# Altium PCB board_pcb.PcbDoc
Units mil, origin at the board's own origin, x right, y up, seen from the top; angles counter-clockwise.
Board outline 3432.09 x 2198.82 mil, 2 copper layers (Top Layer, Bottom Layer); 80 components, 59 nets, 333 pads, 43 vias.
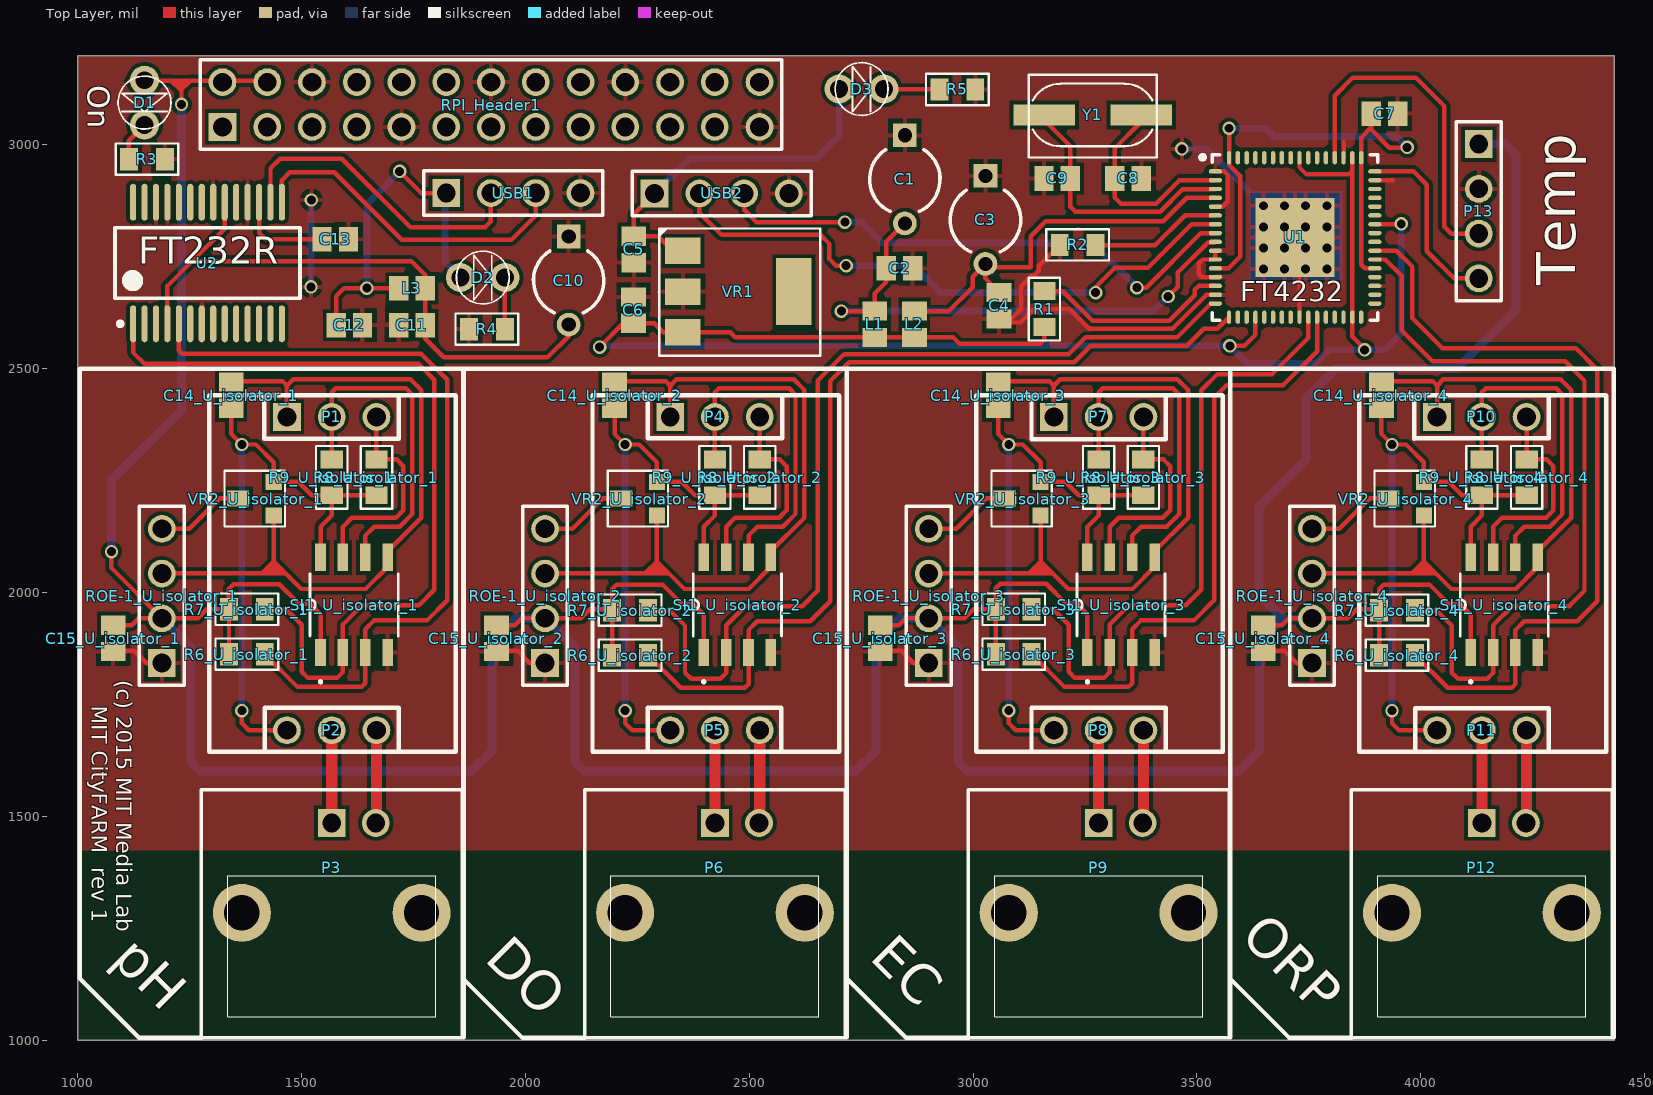
[diagram p0: Top Layer view]
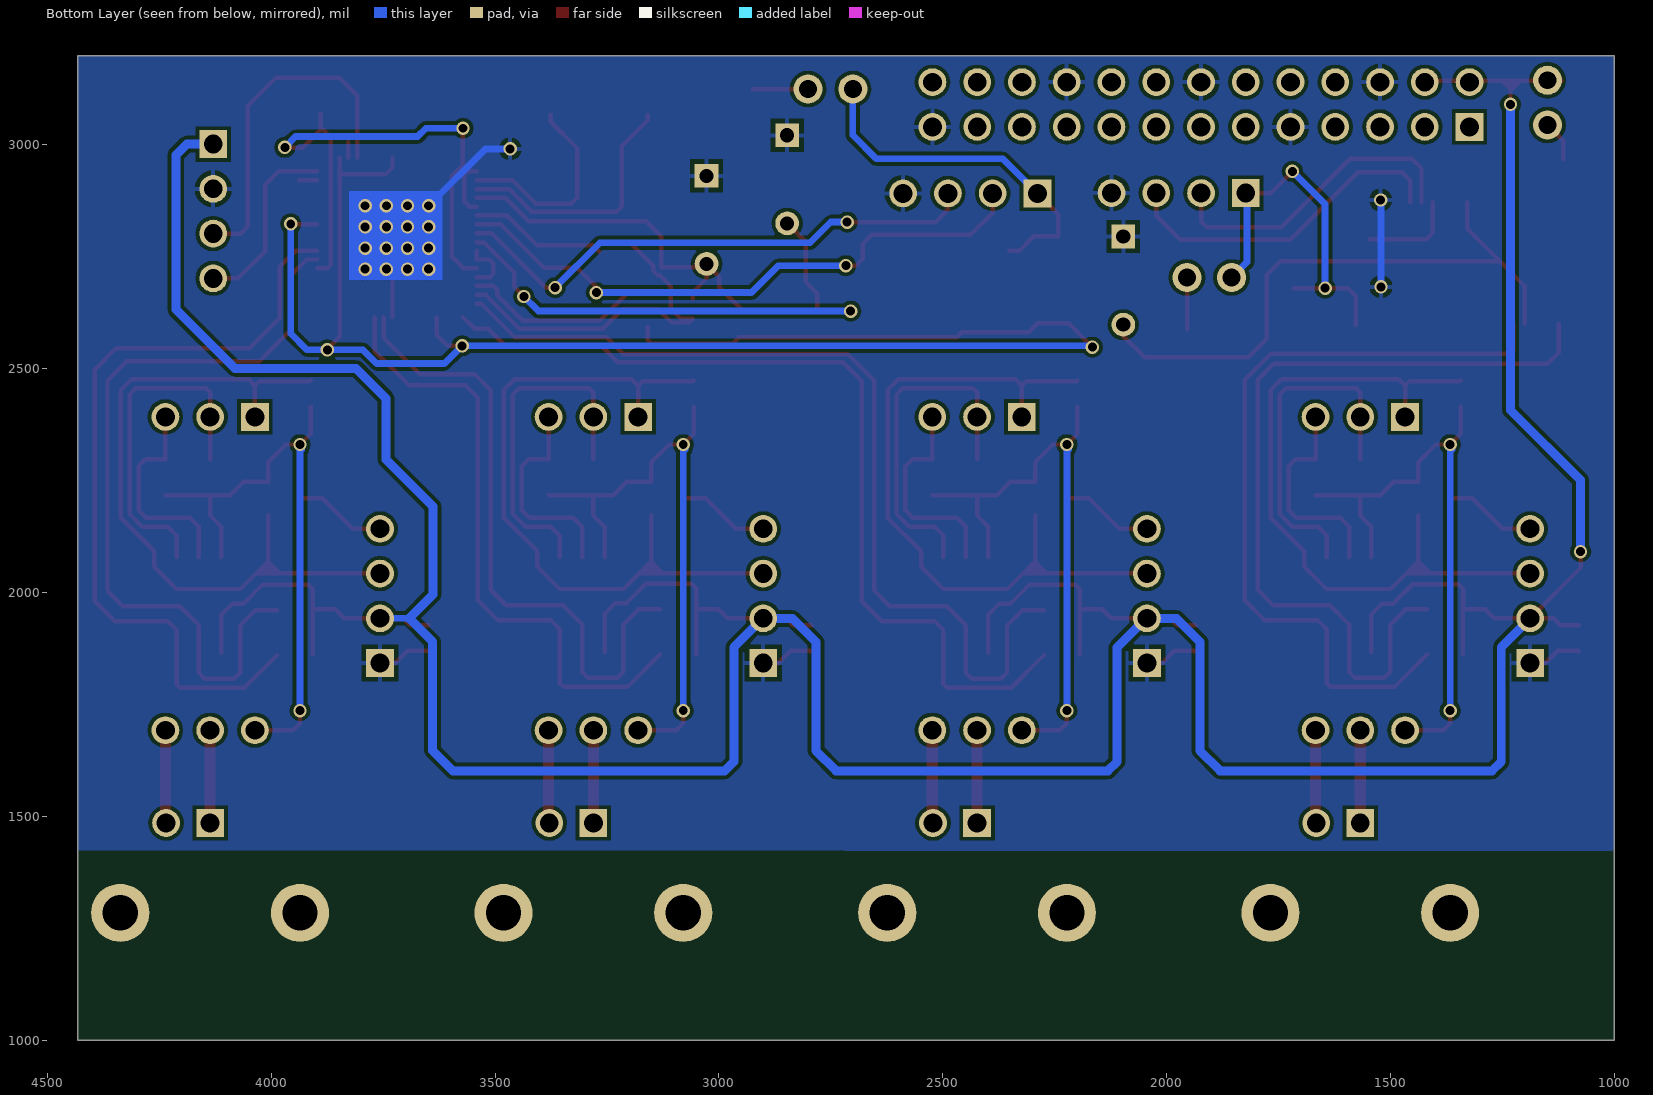
[diagram p1: Bottom Layer view, seen from below]

## Layer stack, top to bottom
Top Solder: solder mask 0.4, Solder Resist, Dk 3.5
Top Layer: signal copper 1.4
Dielectric 1: dielectric 12.6, FR-4, Dk 4.8
Bottom Layer: signal copper 1.4
Bottom Solder: solder mask 0.4, Solder Resist, Dk 3.5

## Board outline
1000,1000 1000,3198.82 4432.09,3198.82 4432.09,1000

## Design rules (kind name [scope] priority, off if disabled: settings)
Clearance [All] p1: gap=8
MinimumSolderMaskSliver [All] p1: minsoldermaskwidth=1.5
PolygonConnect [All] p1: connectstyle=Relief reliefconductorwidth=10 reliefentries=4 polygonreliefangle="90 Angle" airgapwidth=10
RoutingVias [All] p1: holewidth=20 width=50 viastyle="Through Hole" minholewidth=20 minwidth=50 maxholewidth=20 maxwidth=50
SilkToSolderMaskClearance [IsPad] p1: minsilkscreentomaskgap=1 clearancetoexposedcopper=TRUE
SolderMaskExpansion [All] p1: expansion=4
UnpouredPolygon [All] p1: allowunpoured=FALSE
Width [All] p1: maxlimit=25 minlimit=10 preferedwidth=10
27 further rules are at their usual default settings.

## Classes and differential pairs
channel class isolator: U_isolator_1 U_isolator_2 U_isolator_3 U_isolator_4
component class U_serial_4: C1 C2 C3 C4 C5 C6 C7 C8 C9 C071_035 C072_035 C075_029 C080_035 C082_029 C084_035 C096_035 C098_035 C102_035 L1 L2 L079_030 L094_035 R1 R2 R078_035 U1 VR1 VR086_034 Y1 Y074_033
component class U_serial_1: C10 C11 C12 C13 C075_029 C077_029 C096_035 C102_035 L3 L079_030 U2
component class U_isolator_4: C14_U_isolator_4 C15_U_isolator_4 R1_2 R2_ R3_2 R4_ R6_U_isolator_4 R7_U_isolator_4 R8_U_isolator_4 R9_U_isolator_4 R17 R18 R19 R21 ROE-1_U_isolator_4 ROE-4 ROE-0505_2 SI1_U_isolator_4 SI4 SI8600_2 VR2_U_isolator_4
component class U_isolator_3: C14_U_isolator_3 C15_U_isolator_3 R1_2 R2_ R3_2 R4_ R6_U_isolator_3 R7_U_isolator_3 R8_U_isolator_3 R9_U_isolator_3 R14 R15 R16 R20 ROE-1_U_isolator_3 ROE-3 ROE-0505_2 SI1_U_isolator_3 SI3 SI8600_2 VR2_U_isolator_3
component class U_isolator_2: C14_U_isolator_2 C15_U_isolator_2 R1_2 R2_ R3_2 R4_ R6_U_isolator_2 R7_U_isolator_2 R8_U_isolator_2 R9_U_isolator_2 R10 R11 R12 R13 ROE-1_U_isolator_2 ROE-2 ROE-0505_2 SI1_U_isolator_2 SI2 SI8600_2 VR2_U_isolator_2
component class U_isolator_1: C14_U_isolator_1 C15_U_isolator_1 R R1_2 R2_ R3_2 R4_ R6_U_isolator_1 R7_U_isolator_1 R8_U_isolator_1 R9_U_isolator_1 ROE-1 ROE-1_U_isolator_1 ROE-0505_2 SI SI1 SI1_U_isolator_1 SI8600_2 VR2_U_isolator_1
component class board: D1 D2 D3 D085_023 D126_023 D137_023 P1 P2 P3 P4 P5 P6 P7 P8 P9 P10 P11 P12 P13 P070_021 P072_022 P074_022 P079_023 P088_022 P089_022 P094_023 P101_022 P103_022 P107_023 P113_022 P115_022 P119_023 R3 R4 R5 RPI_Header1 USB1 USB2 USB098_021 USB111_021

## Components (designator, comment, footprint, x,y, rotation, side; value= is the part's Value field where it differs from the comment)
C1 "Cap2" CAPR5-4X5 2847.44,2923.23 r270 top locked
C2 "Cap" C0805 2835.63,2724.41 r180 top locked
C3 "Cap2" CAPR5-4X5 3027.56,2832.68 r270 top locked
C4 "Cap" C0805 3058.07,2640.75 r90 top locked
C5 "Cap" C0805 2242.13,2766.73 r90 top locked
C6 "Cap" C0805 2241.14,2630.91 r270 top locked
C7 "Cap" C0805 3919.29,3069.88 r180 top locked
C8 "Cap" C0805 3346.46,2925.2 r180 top locked
C9 "Cap" C0805 3187.99,2925.2 r0 top locked
C10 "Cap2" CAPR5-4X5 2096.46,2696.85 r270 top locked
C11 "Cap" C0805 1746.06,2597.44 r0 top locked
C12 "Cap" C0805 1606.3,2597.44 r180 top locked
C13 "Cap" C0805 1574.8,2789.37 r180 top locked
C14_U_isolator_1 "Cap" C0805 1342.52,2440.94 r270 top locked (schematic designator C14)
C14_U_isolator_2 "Cap" C0805 2198.82,2440.94 r270 top locked (schematic designator C14)
C14_U_isolator_3 "Cap" C0805 3056.1,2440.94 r270 top locked (schematic designator C14)
C14_U_isolator_4 "Cap" C0805 3912.4,2440.94 r270 top locked (schematic designator C14)
C15_U_isolator_1 "Cap" C0805 1078.74,1897.64 r90 top locked (schematic designator C15)
C15_U_isolator_2 "Cap" C0805 1935.04,1897.64 r90 top locked (schematic designator C15)
C15_U_isolator_3 "Cap" C0805 2792.32,1897.64 r90 top locked (schematic designator C15)
C15_U_isolator_4 "Cap" C0805 3648.62,1897.64 r90 top locked (schematic designator C15)
D1 "LED-3MM-GENERIC" LED-3MM-BLUE 1148.62,3144.68 r270 top
D2 "LED-3MM-GENERIC" LED-3MM-BLUE 1854.33,2703.74 r0 top locked
D3 "LED-3MM-GENERIC" LED-3MM-BLUE 2700.79,3125 r0 top locked
L1 "Inductor" C0805 2780.51,2599.41 r90 top locked
L2 "Inductor" C0805 2869.09,2599.41 r90 top locked
L3 "Inductor" C0805 1746.06,2680.12 r0 top locked
P1 "Header 3" HDR1X3#1 1466.93,2392.3 r0 top locked
P2 "Header 3" HDR1X3#2 1466.93,1692.3 r0 top locked
P3 "BNC" "BNC_RA CON" 1566.93,1485.02 r90 top locked
P4 "Header 3" HDR1X3#1 2323.23,2392.3 r0 top locked
P5 "Header 3" HDR1X3#2 2323.23,1692.3 r0 top locked
P6 "BNC" "BNC_RA CON" 2423.23,1485.02 r90 top locked
P7 "Header 3" HDR1X3#1 3180.51,2392.3 r0 top locked
P8 "Header 3" HDR1X3#2 3180.51,1692.3 r0 top locked
P9 "BNC" "BNC_RA CON" 3280.51,1485.02 r90 top locked
P10 "Header 3" HDR1X3#1 4036.81,2392.3 r0 top locked
P11 "Header 3" HDR1X3#2 4036.81,1692.3 r0 top locked
P12 "BNC" "BNC_RA CON" 4136.81,1485.02 r90 top locked
P13 "Header 4" HDR1X4 4129.92,3001.97 r270 top locked
R1 "Res1" 0805R-1K 3159.45,2663.39 r270 top locked
R2 "12K" 0805R-12K 3203.74,2776.57 r0 top locked
R3 "Res1" 0805R-330 1114.17,2968.5 r0 top locked
R4 "Res1" 0805R-330 1953.74,2588.58 r180 top locked
R5 "Res1" 0805R-330 3004.92,3124.02 r180 top locked
R6_U_isolator_1 "Res1" 0805R-10K 1417.32,1862.2 r180 top locked (schematic designator R6)
R6_U_isolator_2 "Res1" 0805R-10K 2273.62,1860.24 r180 top locked (schematic designator R6)
R6_U_isolator_3 "Res1" 0805R-10K 3130.91,1862.2 r180 top locked (schematic designator R6)
R6_U_isolator_4 "Res1" 0805R-10K 3987.2,1860.24 r180 top locked (schematic designator R6)
R7_U_isolator_1 "Res1" 0805R-10K 1417.32,1962.6 r180 top locked (schematic designator R7)
R7_U_isolator_2 "Res1" 0805R-10K 2273.62,1960.63 r180 top locked (schematic designator R7)
R7_U_isolator_3 "Res1" 0805R-10K 3130.91,1962.6 r180 top locked (schematic designator R7)
R7_U_isolator_4 "Res1" 0805R-10K 3987.2,1960.63 r180 top locked (schematic designator R7)
R8_U_isolator_1 "Res1" 0805R-10K 1666.93,2297.3 r270 top locked (schematic designator R8)
R8_U_isolator_2 "Res1" 0805R-10K 2523.23,2297.3 r270 top locked (schematic designator R8)
R8_U_isolator_3 "Res1" 0805R-10K 3380.51,2297.3 r270 top locked (schematic designator R8)
R8_U_isolator_4 "Res1" 0805R-10K 4236.81,2297.3 r270 top locked (schematic designator R8)
R9_U_isolator_1 "Res1" 0805R-10K 1566.93,2297.3 r270 top locked (schematic designator R9)
R9_U_isolator_2 "Res1" 0805R-10K 2423.23,2297.3 r270 top locked (schematic designator R9)
R9_U_isolator_3 "Res1" 0805R-10K 3280.51,2297.3 r270 top locked (schematic designator R9)
R9_U_isolator_4 "Res1" 0805R-10K 4136.81,2297.3 r270 top locked (schematic designator R9)
ROE-1_U_isolator_1 "U1" HDR1X4 1187.4,1842.3 r90 top locked (schematic designator ROE-1)
ROE-1_U_isolator_2 "U1" HDR1X4 2043.7,1842.3 r90 top locked (schematic designator ROE-1)
ROE-1_U_isolator_3 "U1" HDR1X4 2900.98,1842.3 r90 top locked (schematic designator ROE-1)
ROE-1_U_isolator_4 "U1" HDR1X4 3757.28,1842.3 r90 top locked (schematic designator ROE-1)
RPI_Header1 "Header 13X2" HDR2X13 1322.83,3040.35 r0 top
SI1_U_isolator_1 "Si" SOIC-8 1616.93,1972.3 r90 top (schematic designator SI1)
SI1_U_isolator_2 "Si" SOIC-8 2473.23,1972.3 r90 top locked (schematic designator SI1)
SI1_U_isolator_3 "Si" SOIC-8 3330.51,1972.3 r90 top locked (schematic designator SI1)
SI1_U_isolator_4 "Si" SOIC-8 4186.81,1972.3 r90 top locked (schematic designator SI1)
U1 "FT4232" QFN64_2_N 3719.49,2793.31 r0 top locked
U2 "FT232R" SSOP-28_N 1289.37,2736.22 r90 top locked
USB1 "Header 4" HDR1X4 1822.72,2892.56 r0 top locked
USB2 "Header 4" HDR1X4 2288.39,2891.73 r0 top locked
VR1 "Volt Reg" SOT223 2458.66,2672.24 r270 top locked
VR2_U_isolator_1 "Volt Reg" SOT23-123 1437.4,2172.3 r180 top locked (schematic designator VR2)
VR2_U_isolator_2 "Volt Reg" SOT23-123 2293.7,2172.3 r180 top locked (schematic designator VR2)
VR2_U_isolator_3 "Volt Reg" SOT23-123 3150.98,2172.3 r180 top locked (schematic designator VR2)
VR2_U_isolator_4 "Volt Reg" SOT23-123 4007.28,2172.3 r180 top locked (schematic designator VR2)
Y1 "12MHz" XTAL-HC49US-7MM 3375.43,3067.01 r180 top locked

## Footprints (in the part's own frame and the unit in brackets; to place one, negate y for a bottom-side part, rotate by r counter-clockwise, add the part's x,y. Pads: shape width x height; smd on the part's side, far side on the other; paste and mask are expansions set on the pad)
0805R-1K [mil] "RESISTOR 0805"
  rect 40x50 smd: 1(-10,0) 2(70,0)
  silkscreen extent -40,-35 100,35, body extent -11,-25 70,25, height 27
0805R-10K [mil] "RESISTOR 0805"
  rect 40x50 smd: 1(0,0) 2(80,0)
  silkscreen extent -30,-35 110,35, body extent -1,-25 80,25, height 27
0805R-12K [mil] "RESISTOR 0805"
  rect 40x50 smd: 1(-10,0) 2(70,0)
  silkscreen extent -40,-35 100,35, body extent -11,-25 70,25, height 27
0805R-330 [mil] "RESISTOR 0805"
  rect 40x50 smd: 1(0,0) 2(80,0)
  silkscreen extent -30,-35 110,35, body extent -1,-25 80,25, height 27
"BNC_RA CON" [mm] "Connector; BNC Elbow"
  rect 1.575x1.575 hole 1.067: 1(0,0)
  round 3.3 hole 2: 2(-5.1,-5.1) 2(-5.1,5.1)
  round 1.575 hole 1.067: 2(0,-2.5)
  silkscreen extent -12.2,-7.4 1.9,7.4
C0805 [mm] "Chip Capacitor, Body 2.0x1.3mm, IPC High Density"
  rect 1.1x1.4 smd: 1(-0.75,0) 2(0.75,0)
  body extent -1.1,-0.72 1.1,0.72, height 1.4
CAPR5-4X5 [mm] "Capacitor; 2 Leads"
  rect 1.35x1.35 hole 0.8: 1(-2.5,0)
  round 1.35 hole 0.8: 2(2.5,0)
  silkscreen extent -1.69,-2 1.82,2
HDR1X3#1 [mil] "Connector; Header; 3 Position"
  rect 62x62 hole 42: 1(0,0)
  round 62 hole 42: 2(100,0) 3(200,0)
HDR1X3#2 [mil] "Connector; Header; 3 Position"
  round 62 hole 42: 1(0,0) 2(100,0) 3(200,0)
HDR1X4 [mil] "Connector; Header; 4 Position"
  rect 62x62 hole 42: 1(0,0)
  round 62 hole 42: 2(100,0) 3(200,0) 4(300,0)
  silkscreen extent -50,-50 350,50
HDR2X13 [mil] "Connector; Header; 13x2 Position"
  rect 62x62 hole 42: 1(0,0)
  round 62 hole 42: 2(0,100) 3(100,0) 4(100,100) 5(200,0) 6(200,100) 7(300,0) 8(300,100) 9(400,0) 10(400,100) 11(500,0) 12(500,100) 13(600,0) 14(600,100) 15(700,0) 16(700,100) 17(800,0) 18(800,100) 19(900,0) 20(900,100) 21(1000,0) 22(1000,100) 23(1100,0) 24(1100,100) 25(1200,0) 26(1200,100)
  silkscreen extent -50,-50 1250,150
LED-3MM-BLUE [mil]
  round 65 hole 40: A(0,0) K(100,0)
  silkscreen extent -9,-59 109,59, body extent -15,-63 114,67, height 250
QFN64_2_N [mm] "QFN, 64-Leads, Body 9x9mm, Pitch 0.5mm, IPC Medium Density"
  oval 0.75x0.25 smd: 1(-4.525,3.75) 2(-4.525,3.25) 3(-4.525,2.75) 4(-4.525,2.25) 5(-4.525,1.75) 6(-4.525,1.25) 7(-4.525,0.75) 8(-4.525,0.25) 9(-4.525,-0.25) 10(-4.525,-0.75) 11(-4.525,-1.25) 12(-4.525,-1.75) 13(-4.525,-2.25) 14(-4.525,-2.75) 15(-4.525,-3.25) 16(-4.525,-3.75) 33(4.525,-3.75) 34(4.525,-3.25) 35(4.525,-2.75) 36(4.525,-2.25) 37(4.525,-1.75) 38(4.525,-1.25) 39(4.525,-0.75) 40(4.525,-0.25) 41(4.525,0.25) 42(4.525,0.75) 43(4.525,1.25) 44(4.525,1.75) 45(4.525,2.25) 46(4.525,2.75) 47(4.525,3.25) 48(4.525,3.75)
  oval 0.25x0.75 smd: 17(-3.75,-4.525) 18(-3.25,-4.525) 19(-2.75,-4.525) 20(-2.25,-4.525) 21(-1.75,-4.525) 22(-1.25,-4.525) 23(-0.75,-4.525) 24(-0.25,-4.525) 25(0.25,-4.525) 26(0.75,-4.525) 27(1.25,-4.525) 28(1.75,-4.525) 29(2.25,-4.525) 30(2.75,-4.525) 31(3.25,-4.525) 32(3.75,-4.525) 49(3.75,4.525) 50(3.25,4.525) 51(2.75,4.525) 52(2.25,4.525) 53(1.75,4.525) 54(1.25,4.525) 55(0.75,4.525) 56(0.25,4.525) 57(-0.25,4.525) 58(-0.75,4.525) 59(-1.25,4.525) 60(-1.75,4.525) 61(-2.25,4.525) 62(-2.75,4.525) 63(-3.25,4.525) 64(-3.75,4.525)
  rect 4.5x4.5 smd: 65(0,0)
  silkscreen extent -5.37,-4.7 4.7,4.7, body extent -4.55,-4.55 4.55,4.55, height 1
SOIC-8 [mm]
  rect 1.55x0.6 smd: 1(-2.7,1.905) 2(-2.7,0.635) 3(-2.7,-0.635) 4(-2.7,-1.905) 5(2.7,-1.905) 6(2.7,-0.635) 7(2.7,0.635) 8(2.7,1.905)
  silkscreen extent -4.44,-2.5 1.77,2.5
SOT23-123 [mil]
  rect 36x36 smd: 1(0,0) 2(0,-75)
  rect 50x36 smd: 3(80,-38)
  silkscreen extent -25,-100 110,25, body extent -3,-95 94,20, height 41
SOT223 [mil]
  rect 59x79 smd: 1(-91,-107) 2(0,-107) 3(91,-107)
  rect 150x79 smd: 4(0,141)
  silkscreen extent -141,-161 143,200, body extent -131,-105 135,162, height 51
SSOP-28_N [mm] "SOP, 28-Leads, Body 10.2x5.3mm, Pitch 0.65mm, IPC Medium Density"
  oval 2.1x0.35 smd: 1(-3.45,4.225) 2(-3.45,3.575) 3(-3.45,2.925) 4(-3.45,2.275) 5(-3.45,1.625) 6(-3.45,0.975) 7(-3.45,0.325) 8(-3.45,-0.325) 9(-3.45,-0.975) 10(-3.45,-1.625) 11(-3.45,-2.275) 12(-3.45,-2.925) 13(-3.45,-3.575) 14(-3.45,-4.225) 15(3.45,-4.225) 16(3.45,-3.575) 17(3.45,-2.925) 18(3.45,-2.275) 19(3.45,-1.625) 20(3.45,-0.975) 21(3.45,-0.325) 22(3.45,0.325) 23(3.45,0.975) 24(3.45,1.625) 25(3.45,2.275) 26(3.45,2.925) 27(3.45,3.575) 28(3.45,4.225)
  silkscreen extent -3.57,-5.25 2,5.25, body extent -2.8,-5.25 2.8,5.25, height 2
XTAL-HC49US-7MM [mm]
  rect 3.5x1.2 smd: 1(0,0) 2(5.499,0)
  silkscreen extent -0.89,-2.29 6.38,2.41, body extent -1.61,-2.27 7.07,2.41, height 3.05

## Part data
C1 C2 C3 C4 C5 C6 C7 C8 C9 C10 C11 C12 C13 C14_U_isolator_1 C14_U_isolator_2 C14_U_isolator_3 C14_U_isolator_4 C15_U_isolator_1 C15_U_isolator_2 C15_U_isolator_3 C15_U_isolator_4: "Capacitor"
D1 D2 D3: "GENERIC LED 3MM"
P1 P2 P4 P5 P7 P8 P10 P11: "Header, 3-Pin"
P3 P6 P9 P12: "BNC Elbow Connector"
P13 USB1 USB2: "Header, 4-Pin"
R1 R3 R4 R5 R6_U_isolator_1 R6_U_isolator_2 R6_U_isolator_3 R6_U_isolator_4 R7_U_isolator_1 R7_U_isolator_2 R7_U_isolator_3 R7_U_isolator_4 R8_U_isolator_1 R8_U_isolator_2 R8_U_isolator_3 R8_U_isolator_4 R9_U_isolator_1 R9_U_isolator_2 R9_U_isolator_3 R9_U_isolator_4: "Resistor"
R2: library part Res1, "Resistor"
ROE-1_U_isolator_1 ROE-1_U_isolator_2 ROE-1_U_isolator_3 ROE-1_U_isolator_4: library part "Header 4", "Header, 4-Pin"
RPI_Header1: "Header, 13-Pin, Dual row"
SI1_U_isolator_1 SI1_U_isolator_2 SI1_U_isolator_3 SI1_U_isolator_4: library part Si8600AC-B-IS, "Imported"
U1: library part FT4232HQ-Tray, "Quad High Speed USB To Multipurpose UART/MPSSE IC, QFN-64, Tray"
U2: library part FT232RL-Tray, "USB UART Asynchronous Serial Data Transfer Chip, SSOP-28, Tray"
VR1 VR2_U_isolator_1 VR2_U_isolator_2 VR2_U_isolator_3 VR2_U_isolator_4: "Voltage Regulator"
Y1: library part XTAL, "Crystal Oscillator"

## Via types
v1: diameter 30, hole 20, Top Layer to Bottom Layer, 27 vias
v2: diameter 30, hole 20, Top Layer to Bottom Layer, tented top, 16 vias

## Nets (pads, with @x,y where several pads share a name; then routed paths per layer and width w, separated by ;. In a path a pad name is that pad's centre, name@x,y a point inside that pad or via, vN(x,y) a via of type N, cw(c..) or ccw(c..) an arc to the next point about the centre after c; other vN are vias at no path point)
GND: C1.1 C2.1 C3.1 C4.1 C5.1 C6.1 C7.1 C8.1 C9.1 C10.1 C11.1 C12.1 C13.1 C15_U_isolator_1.1 C15_U_isolator_2.1 C15_U_isolator_3.1 C15_U_isolator_4.1 P13.2 R2.1 R3.2 R4.2 R5.1 ROE-1_U_isolator_1.1 ROE-1_U_isolator_2.1 ROE-1_U_isolator_3.1 ROE-1_U_isolator_4.1 RPI_Header1.6 RPI_Header1.9 RPI_Header1.14 RPI_Header1.20 RPI_Header1.25 SI1_U_isolator_1.4 SI1_U_isolator_2.4 SI1_U_isolator_3.4 SI1_U_isolator_4.4 U1.1 U1.5 U1.10 U1.11 U1.13 U1.15 U1.25 U1.35 U1.47 U1.51 U1.65 U2.7 U2.18 U2.21 U2.25 U2.26 USB1.4 USB2.4 VR1.2 | length 2156.2
  Top Layer w10: C15_U_isolator_1.1 1080.71,1870.08 1125.98,1870.08 1153.76,1842.3 ROE-1_U_isolator_1.1 ; RPI_Header1.9@1703.74,3043.31 RPI_Header1.9@1723.82,3043.31 ; C15_U_isolator_2.1 1937.01,1870.08 1982.28,1870.08 2010.06,1842.3 ROE-1_U_isolator_2.1 ; C15_U_isolator_3.1 2794.29,1870.08 2839.57,1870.08 2867.35,1842.3 ROE-1_U_isolator_3.1 ; R2.1 3146.94,2729.77 3146.94,2718.92 3136.39,2708.38 3131.06,2708.38 3107.28,2684.61 3107.28,2633.86 3084.64,2611.22 C4.1 3065.94,2603.35 3106.02,2603.35 3135.55,2632.87 3215.69,2632.87 3259.28,2589.28 3445.45,2589.28 3521.52,2665.35 U1.15 ; U1.13 3511.32,2704.72 3504.18,2711.86 3504.18,2735.48 3512.8,2744.09 U1.11 U1.10 ; U1.5 3556.84,2862.2 3569.1,2874.47 3569.1,2933 3561.16,2940.94 U1.1 ; C15_U_isolator_4.1 3650.59,1870.08 3695.87,1870.08 3723.65,1842.3 ROE-1_U_isolator_4.1 ; U1.25 3729.33,2708.66 v2(3743.11,2722.44) ; U1.51 3827.76,3005.9 ; U1.47 3938.27,2921.26
  Bottom Layer w15: v1(1520.67,2683.07) 1520.67,2875.98 v1(1521.65,2876.97) ; v1(3466.54,2991.14) 3521.65,2991.14 v2(3648.62,2864.17)
  other v2: 3648.62,2722.44 3695.87,2722.44 3790.35,2722.44 3648.62,2769.68 3695.87,2769.68 3743.11,2769.68 3790.35,2769.68 3648.62,2816.93 3695.87,2816.93 3743.11,2816.93 3790.35,2816.93 3695.87,2864.17 3743.11,2864.17 3790.35,2864.17
NetC1_2: C1.2 C2.2 L1.2 U1.9 | length 1216.9
  Top Layer w10: v1(2705.71,2628.94) L1.2 2780.51,2668.31 2806.1,2693.9 C2.2 2806.1,2783.46 C1.2 ; v1(3436.02,2661.42) 3457.68,2683.07 3457.68,2715.3 3524.07,2781.7 3539.57,2781.7 U1.9
  Bottom Layer w15: v1(2705.71,2628.94) 3403.54,2628.94 v1(3436.02,2661.42)
NetC3_2: C3.2 C4.2 L2.2 U1.4 | length 917.6
  Top Layer w10: L2.2 2945.87,2628.94 2999.02,2682.09 2999.02,2705.71 C3.2@3019.69,2726.38 ; C4.2@3058.07,2656.5 3058.07,2671.26 3027.56,2701.77 C3.2 3035.43,2726.38 3128.94,2726.38 3128.94,2796.26 3162.4,2829.72 3425.2,2829.72 3477.36,2881.89 U1.4
NetC6_2: C6.2 L1.1 L2.1 R1.2 U1.20 U1.31 U1.42 U1.50 U1.56 VR1.3 | length 3901.5
  Top Layer w10: v1(2165.35,2548.23) 2218.5,2601.38 C6.2 2287.4,2601.38 2307.54,2581.24 VR1.3 2457.14,2581.24 2468.51,2569.88 L1.1 2955.71,2569.88 2969.49,2556.1 3150.59,2556.1 3159.45,2564.96 R1.2 ; v1(3573.82,2551.18) 3606.3,2551.18 3630.91,2575.79 U1.20 ; U1.56 3729.33,2949.8 3745.08,2934.06 3839.57,2934.06 3847.44,2941.93 ; U1.50 3847.44,2941.93 ; v1@3875,2544.29 3847.44,2571.85 U1.31 3847.44,2647.64 3847.44,2804.13 3847.44,2941.93 ; U1.42 v1@3955.71,2822.83
  Bottom Layer w15: v1(2165.35,2548.23) 2168.31,2551.18 v1(3573.82,2551.18) 3613.19,2511.81 3764.76,2511.81 3795.28,2542.32 v1(3875,2542.32) 3920.28,2542.32 3956.69,2578.74 v1(3956.69,2823.82)
NetC7_2: C7.2 U1.12 U1.37 U1.49 U1.64 | length 1264.1
  Top Layer w10: U1.12 3570.87,2724.41 3596.46,2750 3596.46,2931.1 3571.85,2955.71 U1.64 v1(3571.85,3037.4) ; C7.2@3890.75,3068.9 C7.2 3889.76,3039.37 ; U1.37 3875,2724.41 3867.13,2732.28 U1.49 3867.13,3016.73 3889.76,3039.37 ; v1@3970.47,2995.08 v1(3969.98,2994.59) 3969.49,2994.09 3930.12,2994.09 3889.76,3034.45 3889.76,3039.37
  Bottom Layer w15: v1(3571.85,3037.4) 3654.53,3037.4 3673.23,3018.7 3945.87,3018.7 v1(3969.98,2994.59)
NetC8_2: C8.2 U1.2 Y1.1 | length 460.7
  Top Layer w10: Y1.1 3375.43,3051.61 3316.93,2993.11 C8.2 3316.93,2881.89 3329.72,2869.09 3409,2869.09 3461.17,2921.26 U1.2
NetC9_2: C9.2 U1.3 Y1.2 | length 578.4
  Top Layer w10: Y1.2 3158.93,3055.63 3217.52,2997.05 C9.2 3217.52,2862.2 3228.63,2851.09 3418.02,2851.09 3468.5,2901.57 U1.3
NetC10_2: C10.2 C11.2 L3.2 U2.4 U2.20 | length 1383.8
  Top Layer w10: U2.4 1199.8,2685.04 1254.92,2740.16 ; U2.20 1327.76,2812.99 1254.92,2740.16 ; C10.2 2096.46,2572.83 2049.21,2525.59 1816.93,2525.59 1775.59,2566.93 L3.2 1775.59,2709.64 1745.08,2740.16 1254.92,2740.16
NetC13_2: C13.2 U2.17 | length 214.8
  Top Layer w10: U2.17 1404.53,2804.13 1419.29,2789.37 C13.2
NetC14_U_isolator_1_1: C14_U_isolator_1.1 P1.1 ROE-1_U_isolator_1.3 SI1_U_isolator_1.5 VR2_U_isolator_1.1 | length 1608
  Top Layer w10: ROE-1_U_isolator_1.3@1187.4,2049.37 1193.47,2043.31 1411.34,2043.31 1437.4,2069.37 ; C14_U_isolator_1.1@1342.52,2474.41 1344.49,2472.44 1456.79,2472.44 1466.93,2462.3 ; VR2_U_isolator_1.1 1437.4,2069.37 ; P1.1 1466.93,2462.3 ; 1437.4,2069.37 1498.9,2007.87 1642.5,2007.87 1691.93,2057.3 SI1_U_isolator_1.5 1691.93,2092.3 1766.93,2167.3 1766.93,2452.3 1742.85,2476.38 1481.01,2476.38 1466.93,2462.3
NetC14_U_isolator_1_2: C14_U_isolator_1.2 P2.1 R8_U_isolator_1.2 R9_U_isolator_1.2 SI1_U_isolator_1.8 VR2_U_isolator_1.2 | length 1352.7
  Top Layer w10: C14_U_isolator_1.2@1342.52,2415.35 1342.52,2354.33 v1(1366.14,2330.71) 1397.64,2330.71 1437.4,2290.94 VR2_U_isolator_1.2 1492.4,2247.3 1522.4,2217.3 R9_U_isolator_1.2 ; v1(1366.14,1736.22) 1366.14,1707.43 1366.76,1707.43 1381.89,1692.3 P2.1 ; SI1_U_isolator_1.8 1541.93,2147.3 1566.93,2172.3 R9_U_isolator_1.2 ; R8_U_isolator_1.2 R9_U_isolator_1.2
  Bottom Layer w15: v1@1362.2,2318.9 1366.14,2314.96 ; v1(1366.14,1736.22) 1366.14,2314.96 ; v1(1366.14,2330.71) 1366.14,2314.96
NetC14_U_isolator_2_1: C14_U_isolator_2.1 P4.1 ROE-1_U_isolator_2.3 SI1_U_isolator_2.5 VR2_U_isolator_2.1 | length 1608
  Top Layer w10: ROE-1_U_isolator_2.3@2043.7,2049.37 2049.76,2043.31 2267.64,2043.31 2293.7,2069.37 ; C14_U_isolator_2.1@2198.82,2474.41 2200.79,2472.44 2313.09,2472.44 2323.23,2462.3 ; VR2_U_isolator_2.1 2293.7,2069.37 ; P4.1 2323.23,2462.3 ; 2293.7,2069.37 2355.2,2007.87 2498.8,2007.87 2548.23,2057.3 SI1_U_isolator_2.5 2548.23,2092.3 2623.23,2167.3 2623.23,2452.3 2599.15,2476.38 2337.31,2476.38 2323.23,2462.3
NetC14_U_isolator_2_2: C14_U_isolator_2.2 P5.1 R8_U_isolator_2.2 R9_U_isolator_2.2 SI1_U_isolator_2.8 VR2_U_isolator_2.2 | length 1352.7
  Top Layer w10: C14_U_isolator_2.2@2198.82,2415.35 2198.82,2354.33 v1(2222.44,2330.71) 2253.94,2330.71 2293.7,2290.94 VR2_U_isolator_2.2 2348.7,2247.3 2378.7,2217.3 R9_U_isolator_2.2 ; v1(2222.44,1736.22) 2222.44,1707.43 2223.05,1707.43 2238.19,1692.3 P5.1 ; SI1_U_isolator_2.8 2398.23,2147.3 2423.23,2172.3 R9_U_isolator_2.2 ; R8_U_isolator_2.2 R9_U_isolator_2.2
  Bottom Layer w15: v1@2218.5,2318.9 2222.44,2314.96 ; v1(2222.44,1736.22) 2222.44,2314.96 ; v1(2222.44,2330.71) 2222.44,2314.96
NetC14_U_isolator_3_1: C14_U_isolator_3.1 P7.1 ROE-1_U_isolator_3.3 SI1_U_isolator_3.5 VR2_U_isolator_3.1 | length 1608
  Top Layer w10: ROE-1_U_isolator_3.3@2900.98,2049.37 2907.05,2043.31 3124.92,2043.31 3150.98,2069.37 ; C14_U_isolator_3.1@3056.1,2474.41 3058.07,2472.44 3170.37,2472.44 3180.51,2462.3 ; VR2_U_isolator_3.1 3150.98,2069.37 ; P7.1 3180.51,2462.3 ; 3150.98,2069.37 3212.48,2007.87 3356.09,2007.87 3405.51,2057.3 SI1_U_isolator_3.5 3405.51,2092.3 3480.51,2167.3 3480.51,2452.3 3456.43,2476.38 3194.59,2476.38 3180.51,2462.3
NetC14_U_isolator_3_2: C14_U_isolator_3.2 P8.1 R8_U_isolator_3.2 R9_U_isolator_3.2 SI1_U_isolator_3.8 VR2_U_isolator_3.2 | length 1352.7
  Top Layer w10: C14_U_isolator_3.2@3056.1,2415.35 3056.1,2354.33 v1(3079.72,2330.71) 3111.22,2330.71 3150.98,2290.94 VR2_U_isolator_3.2 3205.98,2247.3 3235.98,2217.3 R9_U_isolator_3.2 ; v1(3079.72,1736.22) 3079.72,1707.43 3080.34,1707.43 3095.47,1692.3 P8.1 ; SI1_U_isolator_3.8 3255.51,2147.3 3280.51,2172.3 R9_U_isolator_3.2 ; R8_U_isolator_3.2 R9_U_isolator_3.2
  Bottom Layer w15: v1@3075.79,2318.9 3079.72,2314.96 ; v1(3079.72,1736.22) 3079.72,2314.96 ; v1(3079.72,2330.71) 3079.72,2314.96
NetC14_U_isolator_4_1: C14_U_isolator_4.1 P10.1 ROE-1_U_isolator_4.3 SI1_U_isolator_4.5 VR2_U_isolator_4.1 | length 1608
  Top Layer w10: ROE-1_U_isolator_4.3@3757.28,2049.37 3763.35,2043.31 3981.22,2043.31 4007.28,2069.37 ; C14_U_isolator_4.1@3912.4,2474.41 3914.37,2472.44 4026.67,2472.44 4036.81,2462.3 ; VR2_U_isolator_4.1 4007.28,2069.37 ; P10.1 4036.81,2462.3 ; 4007.28,2069.37 4068.78,2007.87 4212.39,2007.87 4261.81,2057.3 SI1_U_isolator_4.5 4261.81,2092.3 4336.81,2167.3 4336.81,2452.3 4312.73,2476.38 4050.89,2476.38 4036.81,2462.3
NetC14_U_isolator_4_2: C14_U_isolator_4.2 P11.1 R8_U_isolator_4.2 R9_U_isolator_4.2 SI1_U_isolator_4.8 VR2_U_isolator_4.2 | length 1352.7
  Top Layer w10: C14_U_isolator_4.2@3912.4,2415.35 3912.4,2354.33 v1(3936.02,2330.71) 3967.52,2330.71 4007.28,2290.94 VR2_U_isolator_4.2 4062.28,2247.3 4092.28,2217.3 R9_U_isolator_4.2 ; v1(3936.02,1736.22) 3936.02,1707.43 3936.64,1707.43 3951.77,1692.3 P11.1 ; SI1_U_isolator_4.8 4111.81,2147.3 4136.81,2172.3 R9_U_isolator_4.2 ; R8_U_isolator_4.2 R9_U_isolator_4.2
  Bottom Layer w15: v1@3932.09,2318.9 3936.02,2314.96 ; v1(3936.02,1736.22) 3936.02,2314.96 ; v1(3936.02,2330.71) 3936.02,2314.96
NetC15_U_isolator_1_2: C15_U_isolator_1.2 C15_U_isolator_2.2 C15_U_isolator_3.2 C15_U_isolator_4.2 D1.A P13.1 R6_U_isolator_1.2 R6_U_isolator_2.2 R6_U_isolator_3.2 R6_U_isolator_4.2 R7_U_isolator_1.2 R7_U_isolator_2.2 R7_U_isolator_3.2 R7_U_isolator_4.2 ROE-1_U_isolator_1.2 ROE-1_U_isolator_2.2 ROE-1_U_isolator_3.2 ROE-1_U_isolator_4.2 RPI_Header1.2 RPI_Header1.4 SI1_U_isolator_1.1 SI1_U_isolator_2.1 SI1_U_isolator_3.1 SI1_U_isolator_4.1 | length 10421.6
  Top Layer w10: v1(1074.8,2091.54) 1074.8,2054.9 ROE-1_U_isolator_1.2 ; C15_U_isolator_1.2 1120.08,1927.17 1135.21,1942.3 ROE-1_U_isolator_1.2 ; D1.A@1116.73,3143.31 1208.66,3143.31 1227.95,3124.02 1231.3,3124.02 ; v1(1231.3,3090.55) 1231.3,3124.02 ; R7_U_isolator_1.2 1337.32,2008.58 1347.44,2018.7 1449.8,2018.7 1493.11,1975.39 1517.72,1975.39 1541.93,1951.18 SI1_U_isolator_1.1 ; R6_U_isolator_1.2@1337.4,1862.3 1337.4,1962.3 1287.4,1962.3 1267.4,1942.3 ROE-1_U_isolator_1.2 ; RPI_Header1.4@1423.82,3143.31 1323.82,3143.31 1250,3143.31 1250,3142.72 1231.3,3124.02 ; C15_U_isolator_2.2 1976.38,1927.17 1991.51,1942.3 ROE-1_U_isolator_2.2 2123.7,1942.3 2143.7,1962.3 2193.7,1962.3 R6_U_isolator_2.2@2193.7,1862.3 ; R7_U_isolator_2.2@2193.62,1961.62 2193.62,2007.6 2203.74,2017.72 2306.1,2017.72 2349.41,1974.41 2374.02,1974.41 2398.23,1950.2 SI1_U_isolator_2.1@2398.23,1865.02 ; C15_U_isolator_3.2 2833.66,1927.17 2848.8,1942.3 ROE-1_U_isolator_3.2 2980.98,1942.3 3000.98,1962.3 3050.98,1962.3 R6_U_isolator_3.2@3050.98,1862.3 ; R7_U_isolator_3.2@3050.91,1963.58 3050.91,2009.57 3061.02,2019.69 3163.39,2019.69 3206.69,1976.38 3231.3,1976.38 3255.51,1952.16 SI1_U_isolator_3.1@3255.51,1866.98 ; C15_U_isolator_4.2 3689.96,1927.17 3705.1,1942.3 ROE-1_U_isolator_4.2 3837.28,1942.3 3857.28,1962.3 3907.28,1962.3 R6_U_isolator_4.2@3907.28,1862.3 ; R7_U_isolator_4.2@3907.21,1961.62 3907.21,2007.6 3917.32,2017.72 4019.69,2017.72 4062.99,1974.41 4087.6,1974.41 4111.81,1950.2 SI1_U_isolator_4.1@4111.81,1865.02
  Bottom Layer w15: 3692.3,1942.3 ROE-1_U_isolator_4.2 ROE-1_U_isolator_4.2@3758.27,1942.3
  Bottom Layer w20: v1(1074.8,2091.54) 1074.8,2250.98 1231.3,2407.48 v1(1231.3,3090.55) ; ROE-1_U_isolator_1.2 1251.97,1877.73 1251.97,1622.05 1272.64,1601.38 1879.92,1601.38 1925.2,1646.65 1925.2,1889.76 1977.73,1942.3 ROE-1_U_isolator_2.2 ; ROE-1_U_isolator_2.2@2045.67,1942.3 2110.24,1877.73 2110.24,1622.05 2130.91,1601.38 2738.19,1601.38 2783.46,1646.65 2783.46,1889.76 2836,1942.3 2901.97,1942.3 2966.54,1877.73 2966.54,1622.05 2987.2,1601.38 3594.49,1601.38 3639.76,1646.65 3639.76,1889.76 3692.3,1942.3 3638.78,1995.82 3638.78,2191.93 3744.09,2297.24 3744.09,2434.06 3811.02,2500.98 4081.69,2500.98 4213.58,2632.87 4213.58,2977.36 4188.98,3001.97 P13.1
NetD1_K: D1.K R3.1 | length 90.9
  Top Layer w10: R3.1@1113.17,2968.5 1113.17,3009.24 D1.K
NetD2_K: D2.K R4.1 | length 115.4
  Top Layer w10: R4.1 1953.74,2703.15 D2.K
NetD3_K: D3.K R5.2 | length 123.1
  Top Layer w10: D3.K@2801.77,3124.02 R5.2
NetP1_2: P1.2 R9_U_isolator_1.1 SI1_U_isolator_1.6 | length 780
  Top Layer w10: R9_U_isolator_1.1 P1.2 1566.93,2447.3 1576.01,2456.38 1732.85,2456.38 1746.93,2442.3 1746.93,2175.58 1718.64,2147.3 1661.93,2147.3 1641.93,2127.3 SI1_U_isolator_1.6
NetP1_3: P1.3 R8_U_isolator_1.1 SI1_U_isolator_1.7 | length 478.5
  Top Layer w10: SI1_U_isolator_1.7 1591.93,2147.3 1611.93,2167.3 1710.36,2167.3 1726.93,2183.87 1726.93,2282.3 1711.93,2297.3 R8_U_isolator_1.1 P1.3
NetP2_2: P2.2 P3.1 | length 207.3
  Top Layer w25: P3.1 P2.2
NetP2_3: P2.3 P3.2@1665.35,1485.02 | length 225.7
  Top Layer w10: P3.2@1665.35,1485.02 P3.2@1666.93,1486.59 ; P2.3 P2.3@1666.93,1710.02
  Top Layer w25: P3.2@1666.93,1486.59 P2.3
NetP4_2: P4.2 R9_U_isolator_2.1 SI1_U_isolator_2.6 | length 780
  Top Layer w10: R9_U_isolator_2.1 P4.2 2423.23,2447.3 2432.31,2456.38 2589.15,2456.38 2603.23,2442.3 2603.23,2175.58 2574.94,2147.3 2518.23,2147.3 2498.23,2127.3 SI1_U_isolator_2.6
NetP4_3: P4.3 R8_U_isolator_2.1 SI1_U_isolator_2.7 | length 478.5
  Top Layer w10: SI1_U_isolator_2.7 2448.23,2147.3 2468.23,2167.3 2566.66,2167.3 2583.23,2183.87 2583.23,2282.3 2568.23,2297.3 R8_U_isolator_2.1 P4.3
NetP5_2: P5.2 P6.1 | length 207.1
  Top Layer w25: P6.1@2423.23,1485.24 P5.2
NetP5_3: P5.3 P6.2@2521.65,1485.02 | length 225.7
  Top Layer w10: P6.2@2521.65,1485.02 P6.2@2523.23,1486.59 ; P5.3 P5.3@2523.23,1710.02
  Top Layer w25: P6.2@2523.23,1486.59 P5.3
NetP7_2: P7.2 R9_U_isolator_3.1 SI1_U_isolator_3.6 | length 780
  Top Layer w10: R9_U_isolator_3.1 P7.2 3280.51,2447.3 3289.59,2456.38 3446.43,2456.38 3460.51,2442.3 3460.51,2175.58 3432.23,2147.3 3375.51,2147.3 3355.51,2127.3 SI1_U_isolator_3.6
NetP7_3: P7.3 R8_U_isolator_3.1 SI1_U_isolator_3.7 | length 478.5
  Top Layer w10: SI1_U_isolator_3.7 3305.51,2147.3 3325.51,2167.3 3423.94,2167.3 3440.51,2183.87 3440.51,2282.3 3425.51,2297.3 R8_U_isolator_3.1 P7.3
NetP8_2: P8.2 P9.1 | length 207.3
  Top Layer w25: P9.1 P8.2
NetP8_3: P8.3 P9.2@3378.94,1485.02 | length 225.7
  Top Layer w10: P9.2@3378.94,1485.02 P9.2@3380.51,1486.59 ; P8.3 P8.3@3380.51,1710.02
  Top Layer w25: P9.2@3380.51,1486.59 P8.3
NetP10_2: P10.2 R9_U_isolator_4.1 SI1_U_isolator_4.6 | length 780
  Top Layer w10: R9_U_isolator_4.1 P10.2 4136.81,2447.3 4145.89,2456.38 4302.73,2456.38 4316.81,2442.3 4316.81,2175.58 4288.53,2147.3 4231.81,2147.3 4211.81,2127.3 SI1_U_isolator_4.6
NetP10_3: P10.3 R8_U_isolator_4.1 SI1_U_isolator_4.7 | length 478.5
  Top Layer w10: SI1_U_isolator_4.7 4161.81,2147.3 4181.81,2167.3 4280.24,2167.3 4296.81,2183.87 4296.81,2282.3 4281.81,2297.3 R8_U_isolator_4.1 P10.3
NetP11_2: P11.2 P12.1 | length 207.3
  Top Layer w25: P12.1 P11.2
NetP11_3: P11.3 P12.2@4235.24,1485.02 | length 225.7
  Top Layer w10: P12.2@4235.24,1485.02 P12.2@4236.81,1486.59 ; P11.3 P11.3@4236.81,1710.02
  Top Layer w25: P12.2@4236.81,1486.59 P11.3
NetP13_3: P13.3 U1.52 | length 779.7
  Top Layer w10: U1.52 3808.07,3110.24 3848.43,3150.59 3989.17,3150.59 4053.15,3086.61 4053.15,2816.93 4068.11,2801.97 P13.3
NetP13_4: P13.4 U1.48 | length 418.3
  Top Layer w10: U1.48 3984.25,2940.94 4013.78,2911.42 4013.78,2762.8 4074.61,2701.97 P13.4
NetR1_1: R1.1 U1.14 | length 448.4
  Top Layer w10: R1.1 3200.63,2673.39 3266.73,2607.28 3437.99,2607.28 3495.08,2664.37 3495.08,2676.18 3503.94,2685.04 U1.14
NetR2_2: R2.2 U1.6 | length 308
  Top Layer w10: R2.2@3267.72,2761.81 3281.5,2775.59 3406.5,2775.59 3471.74,2840.83 3474.41,2840.83 3474.41,2842.52 U1.6
NetR6_U_isolator_1_1: R6_U_isolator_1.1 SI1_U_isolator_1.3 U2.5 | length 1767.1
  Top Layer w10: U2.5 1225.39,2541.34 1233.27,2533.46 1766.47,2533.46 1824.8,2475.13 1824.8,1982.48 1779.92,1937.6 1661.42,1937.6 1641.93,1918.11 SI1_U_isolator_1.3 1641.93,1797.44 1633.54,1789.06 1490.47,1789.06 R6_U_isolator_1.1
NetR6_U_isolator_2_1: R6_U_isolator_2.1 SI1_U_isolator_2.3 U1.17 | length 2030.4
  Top Layer w10: R6_U_isolator_2.1 2346.77,1787.09 2489.84,1787.09 2498.23,1795.47 2498.23,1916.14 2517.72,1935.63 2636.22,1935.63 2681.1,1980.51 2681.1,2472.44 2723.43,2514.76 3226.38,2514.76 3262.8,2551.18 3477.36,2551.18 3515.36,2589.18 3545.88,2589.18 U1.17
NetR6_U_isolator_3_1: R6_U_isolator_3.1 SI1_U_isolator_3.3 U1.27 | length 1390.5
  Top Layer w10: R6_U_isolator_3.1 3204.06,1789.06 3347.13,1789.06 3355.51,1797.44 SI1_U_isolator_3.3 3355.51,1918.11 3375,1937.6 3493.51,1937.6 3538.39,1982.48 3538.39,2435.04 3566.93,2463.58 3692.91,2463.58 3768.7,2539.37 U1.27
NetR6_U_isolator_4_1: R6_U_isolator_4.1 SI1_U_isolator_4.3 U1.39 | length 1780.7
  Top Layer w10: U1.39 3945.87,2763.78 3981.3,2728.35 3981.3,2613.19 4048.23,2546.26 4346.46,2546.26 4394.69,2498.03 4394.69,1980.51 4349.81,1935.63 4231.3,1935.63 4211.81,1916.14 4211.81,1795.47 4203.43,1787.09 4060.36,1787.09 R6_U_isolator_4.1
NetR7_U_isolator_1_1: R7_U_isolator_1.1 SI1_U_isolator_1.2 U2.1 | length 1880.1
  Top Layer w10: U2.1 1123.03,2536.42 1148.62,2510.83 1760.83,2510.83 1796.26,2475.39 1796.26,2005.91 1761.81,1971.46 1634.65,1971.46 1591.93,1928.74 SI1_U_isolator_1.2 1591.93,1822.25 1578.74,1809.06 1513.78,1809.06 1500,1822.83 1500,1928.15 1465.55,1962.6 R7_U_isolator_1.1
NetR7_U_isolator_2_1: R7_U_isolator_2.1 SI1_U_isolator_2.2 U1.16 | length 2077.8
  Top Layer w10: R7_U_isolator_2.1 2321.85,1960.63 2356.3,1926.18 2356.3,1820.87 2370.08,1807.09 2435.04,1807.09 2448.23,1820.28 2448.23,1926.77 2490.95,1969.49 2618.11,1969.49 2652.56,2003.94 2652.56,2473.43 2711.9,2532.76 3213.87,2532.76 3251.97,2570.87 3456.69,2570.87 3531.5,2645.67 U1.16
NetR7_U_isolator_3_1: R7_U_isolator_3.1 SI1_U_isolator_3.2 U1.26 | length 1428
  Top Layer w10: R7_U_isolator_3.1 3179.13,1962.6 3213.58,1928.15 3213.58,1822.83 3227.36,1809.06 3292.32,1809.06 3305.51,1822.25 SI1_U_isolator_3.2 3305.51,1928.74 3348.23,1971.46 3475.39,1971.46 3509.84,2005.91 3509.84,2451.77 3546.26,2488.19 3668.31,2488.19 3749.02,2568.9 U1.26
NetR7_U_isolator_4_1: R7_U_isolator_4.1 SI1_U_isolator_4.2 U1.38 | length 1769.7
  Top Layer w10: U1.38 3921.26,2744.09 3957.68,2707.68 3957.68,2585.63 4026.57,2516.73 4322.84,2516.73 4366.14,2473.43 4366.14,2003.94 4331.69,1969.49 4204.53,1969.49 4161.81,1926.77 4161.81,1820.28 4148.62,1807.09 4083.66,1807.09 4069.88,1820.87 4069.88,1926.18 4035.43,1960.63 R7_U_isolator_4.1
NetROE-1_U_isolator_1_4: ROE-1_U_isolator_1.4 VR2_U_isolator_1.3 | length 198.2
  Top Layer w10: ROE-1_U_isolator_1.4 1248.6,2142.3 1316.6,2210.3 VR2_U_isolator_1.3
NetROE-1_U_isolator_2_4: ROE-1_U_isolator_2.4 VR2_U_isolator_2.3 | length 198.2
  Top Layer w10: ROE-1_U_isolator_2.4 2104.9,2142.3 2172.9,2210.3 VR2_U_isolator_2.3
NetROE-1_U_isolator_3_4: ROE-1_U_isolator_3.4 VR2_U_isolator_3.3 | length 198.2
  Top Layer w10: ROE-1_U_isolator_3.4 2962.18,2142.3 3030.18,2210.3 VR2_U_isolator_3.3
NetROE-1_U_isolator_4_4: ROE-1_U_isolator_4.4 VR2_U_isolator_4.3 | length 198.2
  Top Layer w10: ROE-1_U_isolator_4.4 3818.48,2142.3 3886.48,2210.3 VR2_U_isolator_4.3
NetU1_7: U1.7 USB2.2 | length 1359.6
  Top Layer w10: USB2.2 2388.39,2848.82 2437.99,2799.21 2658.66,2799.21 2679.13,2778.74 2679.13,2745.08 2693.9,2730.32 v1(2716.54,2730.32) ; v1(3273.62,2670.28) 3273.62,2682.09 3316.93,2725.39 3390.75,2725.39 3488.19,2822.83 U1.7
  Bottom Layer w15: v1(2716.54,2730.32) 2867.13,2730.32 2927.17,2670.28 v1(3273.62,2670.28)
NetU1_8: U1.8 USB2.3 | length 1212.2
  Top Layer w10: USB2.3 2488.39,2855.12 2515.75,2827.76 v1(2713.58,2827.76) ; v1(3366.14,2681.1) 3386.81,2681.1 3508.86,2803.15 U1.8
  Bottom Layer w15: v1(2713.58,2827.76) 2750,2827.76 2796.26,2781.5 3265.75,2781.5 v1(3366.14,2681.1)
NetU2_15: U2.15 USB1.3 | length 758.4
  Top Layer w10: U2.15 1455.71,2921.26 1473.43,2938.98 1572.83,2938.98 1723.43,2788.39 1968.5,2788.39 2022.72,2842.6 USB1.3
NetU2_16: U2.16 USB1.2 | length 709.8
  Top Layer w10: U2.16 1430.12,2947.84 1451.77,2969.49 1589.57,2969.49 1743.11,2815.94 1909.41,2815.94 1922.72,2829.25 USB1.2
VCC_USB_1: C5.2 D3.A USB2.1 VR1.1 | length 807.4
  Top Layer w10: USB2.1 2242.13,2845.47 C5.2 2296.26,2796.26 2329.28,2763.24 VR1.1
  Bottom Layer w15: USB2.1 2366.14,2969.49 2648.62,2969.49 2700.79,3021.65 D3.A
VCC_USB_2: C12.2 D2.A L3.1 USB1.1 | length 831.6
  Top Layer w10: C12.2 1576.77,2662.4 1594.49,2680.12 v1(1645.67,2680.12) L3.1 ; v1(1718.5,2940.94) 1766.89,2892.56 USB1.1
  Bottom Layer w15: v1(1645.67,2680.12) 1645.67,2868.11 v1(1718.5,2940.94) ; USB1.1 1819.88,2889.73 1819.88,2738.19 D2.A
pads on no net: P3.2@1366.14,1284.23 P3.2@1767.72,1284.23 P6.2@2222.44,1284.23 P6.2@2624.02,1284.23 P9.2@3079.72,1284.23 P9.2@3481.3,1284.23 P12.2@3936.02,1284.23 P12.2@4337.6,1284.23 RPI_Header1.1 RPI_Header1.3 RPI_Header1.5 RPI_Header1.7 RPI_Header1.8 RPI_Header1.10 RPI_Header1.11 RPI_Header1.12 RPI_Header1.13 RPI_Header1.15 RPI_Header1.16 RPI_Header1.17 RPI_Header1.18 RPI_Header1.19 RPI_Header1.21 RPI_Header1.22 RPI_Header1.23 RPI_Header1.24 RPI_Header1.26 U1.18 U1.19 U1.21 U1.22 U1.23 U1.24 U1.28 U1.29 U1.30 U1.32 U1.33 U1.34 U1.36 U1.40 U1.41 U1.43 U1.44 U1.45 U1.46 U1.53 U1.54 U1.55 U1.57 U1.58 U1.59 U1.60 U1.61 U1.62 U1.63 U2.2 U2.3 U2.6 U2.8 U2.9 U2.10 U2.11 U2.12 U2.13 U2.14 U2.19 U2.22 U2.23 U2.24 U2.27 U2.28 VR1.4

## Polygon pours and split planes (outlines as drawn)
GND on Top Layer "Top Layer-No Net" (solid, pour order 15): 4432.09,3198.82 4432.09,1424.21 1000,1423.23 1000,3198.82
GND on Bottom Layer "Top Layer-No Net" (solid, pour order 3): 1000,1422.24 1000.98,1423.23 1000.98,3198.82 4432.09,3198.82 4432.09,1424.21

## Other copper
Top Layer:
  region net NetC15_U_isolator_1_2: 1228,3123.39 1252.61,3148 1203.39,3148 1227.02,3124.38
  region net NetC14_U_isolator_1_1: 1407.99,2038.39 1467.99,2038.39 1437.99,2068.39
  region net NetC14_U_isolator_2_1: 2264.29,2038.39 2324.29,2038.39 2294.29,2068.39
  region net NetC14_U_isolator_4_1: 3977.87,2038.39 4037.87,2038.39 4007.87,2068.39
  region net NetC14_U_isolator_3_1: 3121.58,2038.39 3181.57,2038.39 3151.57,2068.39
Bottom Layer:
  rectangle net GND: 3617.13,2697.83 3826.77,2896.65

## Silkscreen, mask and mechanical layers (free items; w line width, h text height)
Top Overlay:
  lines w10: 1276.57,1004.7 1137.03,1004.7 1004.16,1137.57 1004.16,2499.78 1861.59,2499.78 1861.59,1006.27 1861.22,1005.91 ; 1293.31,1644.69 1293.31,2439.96 1294.29,2440.94 1843.5,2440.94 1844.49,2439.96 1844.49,1644.69 1843.5,1643.7 1716.54,1643.7 1294.29,1643.7 ; 1416.34,2437.99 1416.34,2343.5 1716.54,2343.5 1716.54,2439.96 ; 1416.93,1644.09 1416.93,1742.3 ; 1418.48,1742.3 1716.93,1742.3 1716.93,1646.26 ; 2132.87,1004.7 1993.33,1004.7 1860.46,1137.57 1860.46,2499.78 2717.89,2499.78 2717.89,1006.27 2717.52,1005.91 ; 2149.61,1644.69 2149.61,2439.96 2150.59,2440.94 2699.8,2440.94 2700.79,2439.96 2700.79,1644.69 2699.8,1643.7 2572.83,1643.7 2150.59,1643.7 ; 2272.64,2437.99 2272.64,2344.49 2573.82,2344.49 2573.82,2437.01 ; 2273.23,1649.01 2273.23,1742.3 ; 2273.8,1742.3 2571.85,1742.3 2571.85,1645.67 ; 2990.16,1004.7 2850.62,1004.7 2717.74,1137.57 2717.74,2499.78 3575.17,2499.78 3575.17,1006.27 3574.8,1005.91 ; 3006.89,1644.69 3006.89,2439.96 3007.87,2440.94 3557.09,2440.94 3558.07,2439.96 3558.07,1644.69 3557.09,1643.7 3430.12,1643.7 ; 3007.87,1643.7 3430.51,1643.7 3430.51,1742.3 ; 3130.51,1645.08 3130.51,1742.3 3426.99,1742.3 ; 3130.51,2437.4 3130.51,2342.3 3430.12,2342.3 3430.12,2437.99 3427.17,2440.94 ; 3846.46,1004.7 3706.91,1004.7 3574.04,1137.57 3574.04,2499.78 4431.47,2499.78 4431.47,1006.27 4431.1,1005.91 ; 3863.19,1644.69 3863.19,2439.96 3864.17,2440.94 4413.39,2440.94 4414.37,2439.96 4414.37,1644.69 4413.39,1643.7 4286.42,1643.7 3864.17,1643.7 ; 3986.22,2343.5 3986.22,2437.99 ; 3987.2,2344.49 4286.42,2344.49 4286.42,2439.96 ; 3988.19,1647.64 3988.19,1741.14 ; 3989.17,1741.14 4286.42,1741.14 4286.42,1649.61
  text "On" at 1021.65,3133.86 h50 r270
  text "Temp" at 4374.02,2686.02 h150 r90
  text "(c) 2015 MIT Media Lab" at 1085.63,1804.13 h35 r270
  text "MIT CityFARM  rev 1" at 1030.51,1747.05 h35 r270
  text "ORP" at 3575.17,1208.66 h150 r315
  text "EC" at 2746.06,1161.42 h150 r315
  text "DO" at 1885.83,1158.46 h150 r315
  text "pH" at 1052.17,1157.48 h150 r315
Mechanical 1:
  the board outline again, w10